# EAGLE board RefOsc10MHz_3V0 (EAGLE 7.2.0)
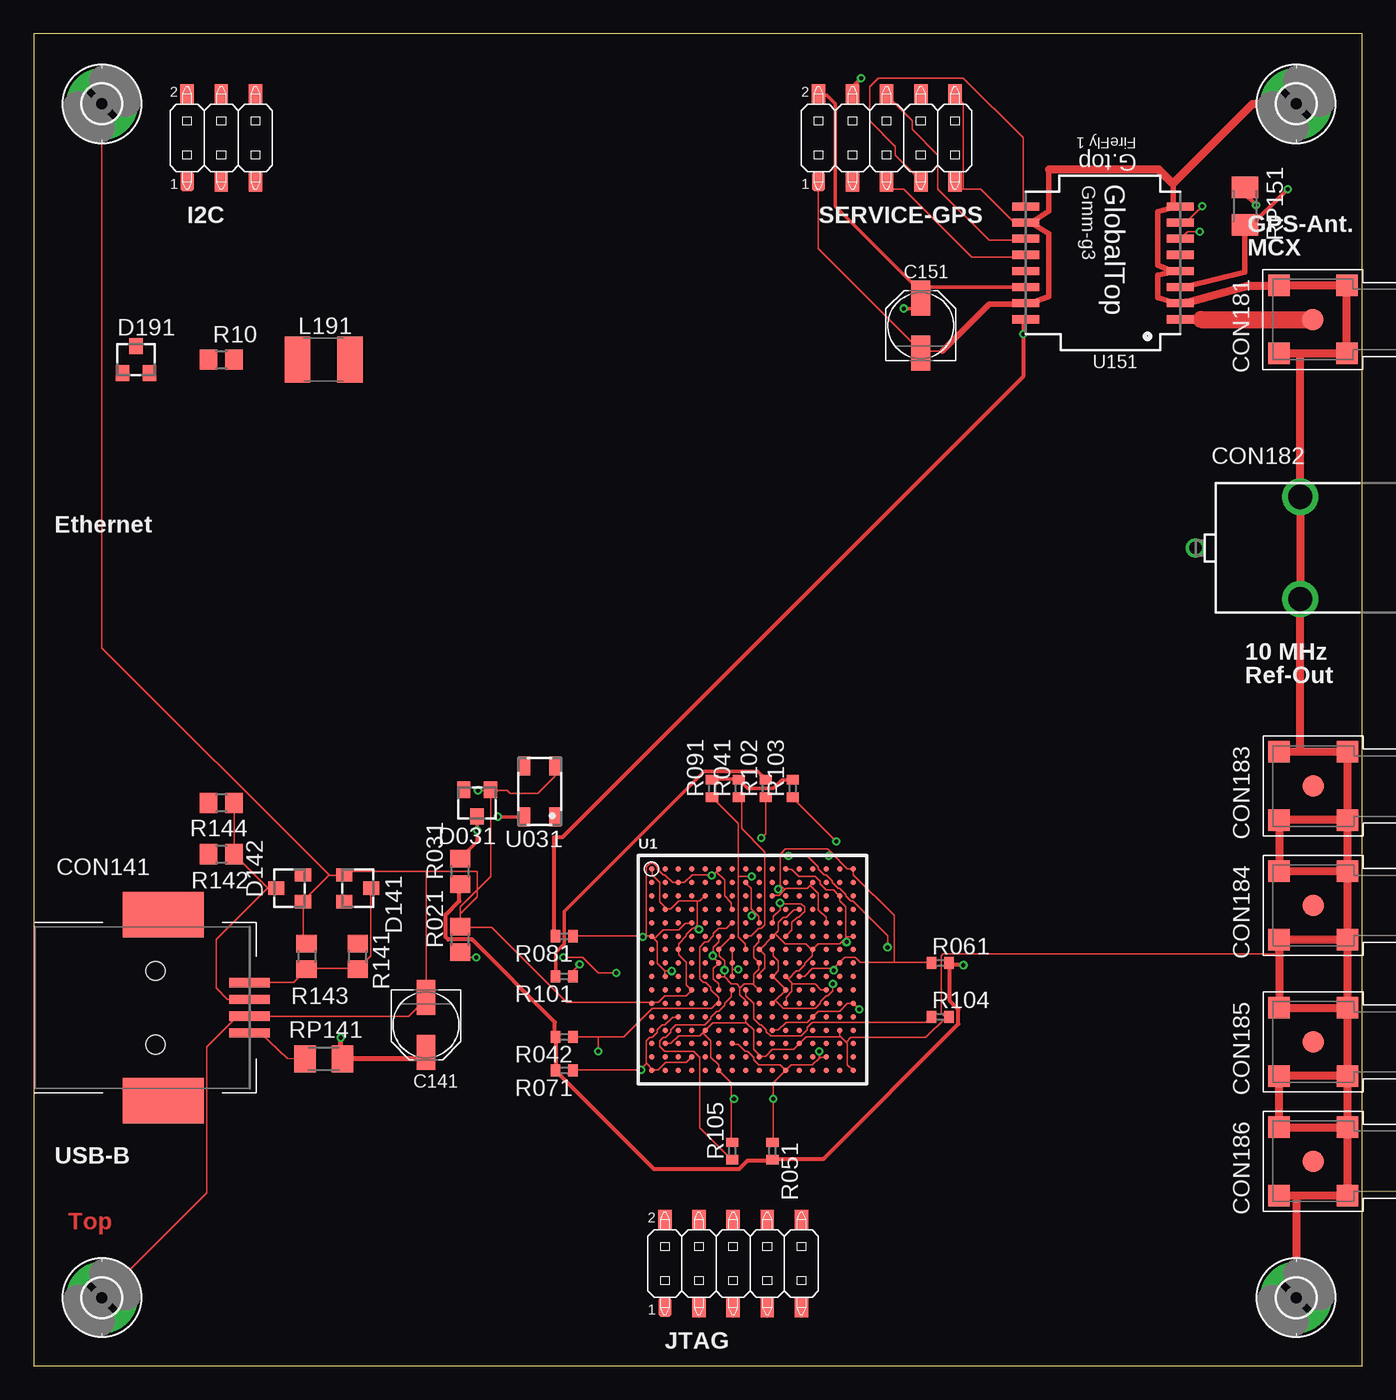
[diagram p0: board, top side]
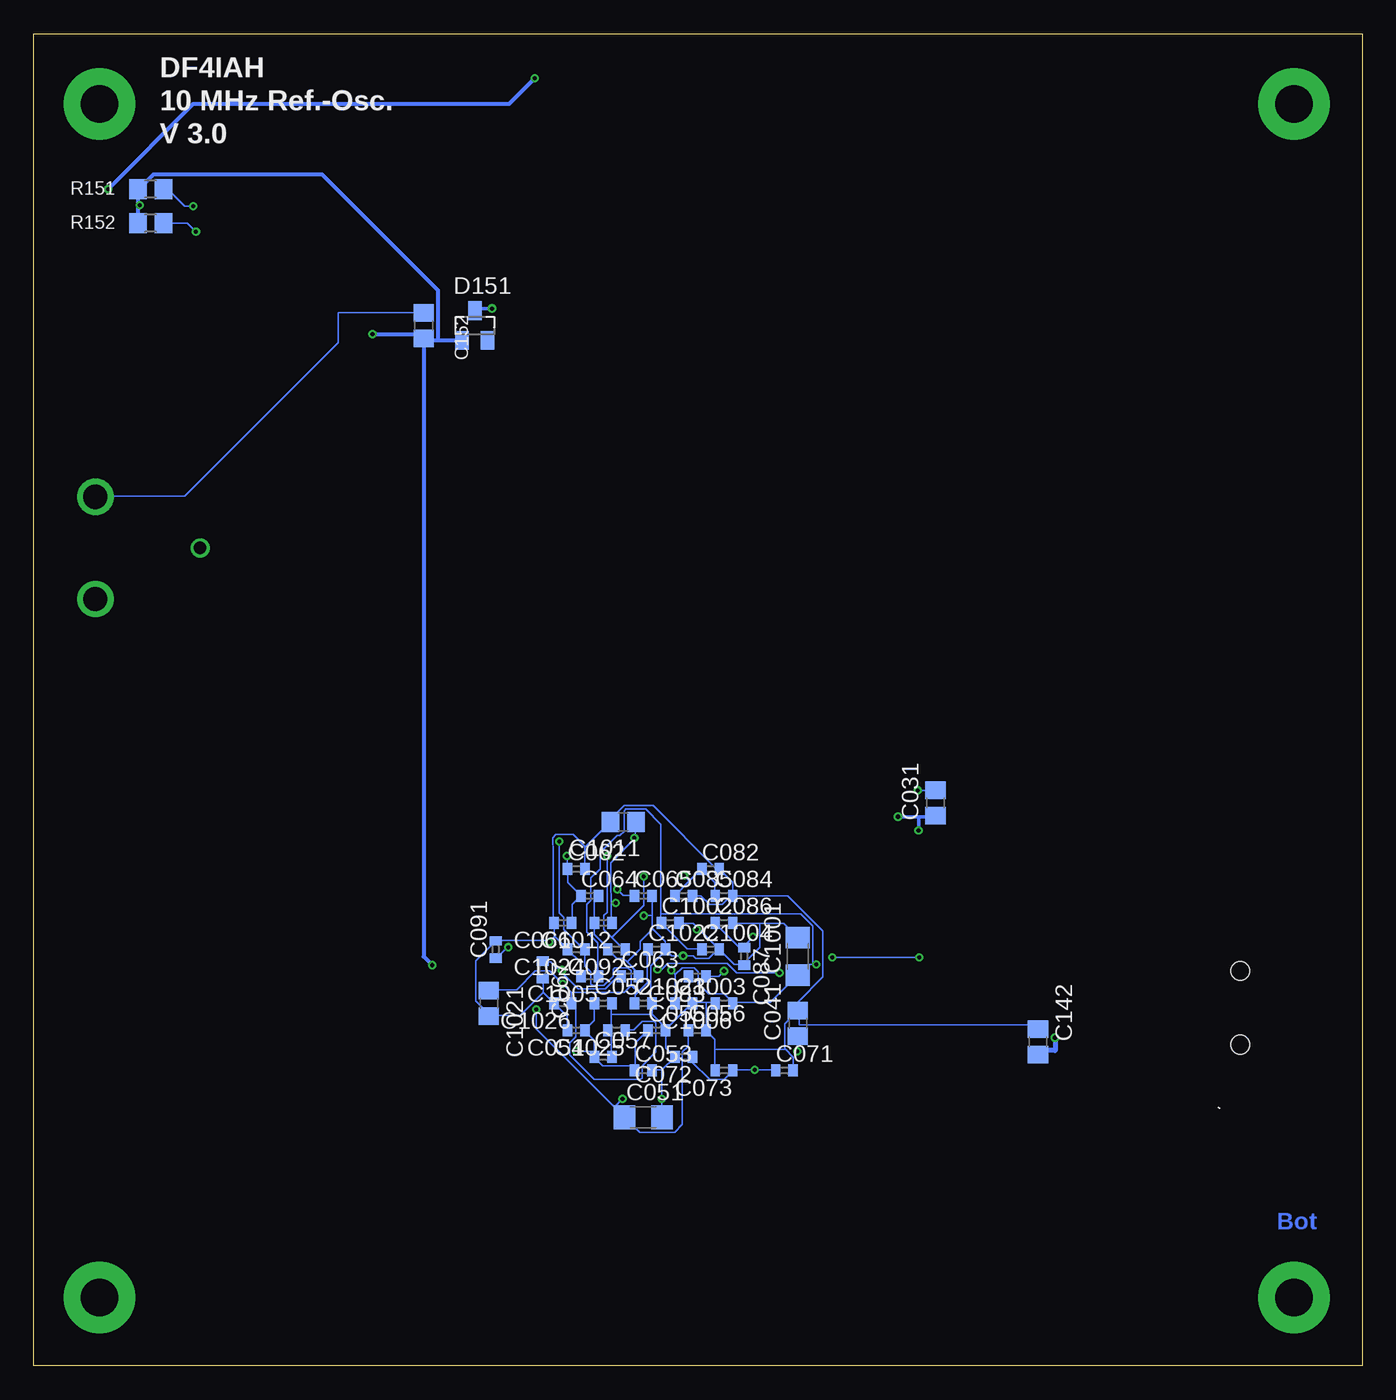
[diagram p1: board, bottom side, seen from below]

Size 98.89 x 99.21 mm. Coordinates in mm from the lower left corner, seen from the top.
Outline: 0,0 98.89,0 98.89,99.21 0,99.21 0,0
Copper layers (1*16): Top 0.035mm / dielectric 1.5mm / Bottom 0.035mm
Design rules "dirt_cheap_dirty_boards.v1": minimum track width 5mil, minimum drill 12mil, track to track 5mil, track to pad 5mil, pad to pad 5mil, via to via 5mil, smd to smd 0mil, copper to edge 10mil, drill to drill 10mil, minimum pad ring 10mil, minimum via ring 6mil, stop-mask expansion 2mil, vias tented up to drill 25mil, thermal gap 10mil
Net classes: 1 PWR_LOW: width 0.254 mm; 2 PWR_MED: width 0.305 mm; 3 PWR_HI: width 0.381 mm; 4 PAIR_50R: width 2.819 mm, clearance 5.08 mm; 5 PAIR_100R: width 1.143 mm, clearance 3.81 mm; 6 CLK: clearance 1.27 mm
tRestrict: area 76.7,76.2 to 82.3,87.5; area 94,76.2 to 96.5,80; area 82.5,76.2 to 91.4,77; area 96.5,94 to 99.1,95.2
bRestrict: area 76.7,76.2 to 82.3,87.5; area 94,76.2 to 96.5,80; area 82.5,76.2 to 91.4,77; area 96.5,94 to 99.1,95.2

## Footprints (pad centres in the part's own frame; a part is rotated, then mirrored left to right if it is on the bottom)
C0805 = smd 1.3 x 1.5: 1 -0.95,0; 2 0.95,0
C1206 = smd 1.6 x 1.8: 1 -1.4,0; 2 1.4,0
C0402 = smd 0.7 x 0.9: 1 -0.65,0; 2 0.65,0
PANASONIC_C = smd 2.6 x 1.4: + 2.05,0; - -2.05,0
TYCO-AMP_USB-B_SMT = smd 6.04 x 3.4: 0A 0,6.92; 0B 0,-6.92 | smd 3 x 0.7: 1 -6.42,1.87; 2 -6.42,-0.62; 3 -6.42,-1.87; 4 -6.42,0.62 | hole 1.4: 0.58,-2.75; 0.58,2.75
2X5SMD = smd 1 x 1.5: 1 -5.08,-3.25; 2 -5.08,3.25; 3 -2.54,-3.25; 4 -2.54,3.25; 5 0,-3.25; 6 0,3.25; 7 2.54,-3.25; 8 2.54,3.25; 9 5.08,-3.25; 10 5.08,3.25
MCX-J-P-X-RA-SM1 = smd 1.6 x 1.6: 1 0,0; 2 -2.54,2.54; 3 2.54,2.54; 4 -2.54,-2.54; 5 2.54,-2.54
MOLEX_BNC-JACK-50R_SD-73100-0105 = drill 0.92: 1 12.4,0 | drill 1.8: 2 4.6,3.8; 3 4.6,-3.8
2X03SMD = smd 1 x 1.5: 1 -2.54,-3.25; 2 -2.54,3.25; 3 0,-3.25; 4 0,3.25; 5 2.54,-3.25; 6 2.54,3.25
TO236 = smd 1 x 1.2: A -1,-1; C 0,1; NC 1,-1
SOT23 = smd 1 x 1.4: 1 -0.95,-1.1; 2 0.95,-1.1; 3 0,1.1
2,8-PAD = drill 2.8 pad 5.334: B2,8 0,0
L1812 = smd 1.9 x 3.4: 1 -1.95,0; 2 1.95,0
R0805 = smd 1.3 x 1.5: 1 -0.95,0; 2 0.95,0
R0402 = smd 0.7 x 0.9: 1 -0.65,0; 2 0.65,0
M1206 = smd 1.6 x 2: 1 -1.4,0; 2 1.4,0
FTG256_0MM4 = smd 0.4 x 0.4: A1 -7.5,7.5; A2 -6.5,7.5; A3 -5.5,7.5; A4 -4.5,7.5; A5 -3.5,7.5; A6 -2.5,7.5; A7 -1.5,7.5; A8 -0.5,7.5; A9 0.5,7.5; A10 1.5,7.5; A11 2.5,7.5; A12 3.5,7.5; A13 4.5,7.5; A14 5.5,7.5; A15 6.5,7.5; A16 7.5,7.5; B1 -7.5,6.5; B2 -6.5,6.5; B3 -5.5,6.5; B4 -4.5,6.5; B5 -3.5,6.5; B6 -2.5,6.5; B7 -1.5,6.5; B8 -0.5,6.5; B9 0.5,6.5; B10 1.5,6.5; B11 2.5,6.5; B12 3.5,6.5; B13 4.5,6.5; B14 5.5,6.5; B15 6.5,6.5; B16 7.5,6.5; C1 -7.5,5.5; C2 -6.5,5.5; C3 -5.5,5.5; C4 -4.5,5.5; C5 -3.5,5.5; C6 -2.5,5.5; C7 -1.5,5.5; C8 -0.5,5.5; C9 0.5,5.5; C10 1.5,5.5; C11 2.5,5.5; C12 3.5,5.5; C13 4.5,5.5; C14 5.5,5.5; C15 6.5,5.5; C16 7.5,5.5; D1 -7.5,4.5; D2 -6.5,4.5; D3 -5.5,4.5; D4 -4.5,4.5; D5 -3.5,4.5; D6 -2.5,4.5; D7 -1.5,4.5; D8 -0.5,4.5; D9 0.5,4.5; D10 1.5,4.5; D11 2.5,4.5; D12 3.5,4.5; D13 4.5,4.5; D14 5.5,4.5; D15 6.5,4.5; D16 7.5,4.5; E1 -7.5,3.5; E2 -6.5,3.5; E3 -5.5,3.5; E4 -4.5,3.5; E5 -3.5,3.5; E6 -2.5,3.5; E7 -1.5,3.5; E8 -0.5,3.5; E9 0.5,3.5; E10 1.5,3.5; E11 2.5,3.5; E12 3.5,3.5; E13 4.5,3.5; E14 5.5,3.5; E15 6.5,3.5; E16 7.5,3.5; F1 -7.5,2.5; F2 -6.5,2.5; F3 -5.5,2.5; F4 -4.5,2.5; F5 -3.5,2.5; F6 -2.5,2.5; F7 -1.5,2.5; F8 -0.5,2.5; F9 0.5,2.5; F10 1.5,2.5; F11 2.5,2.5; F12 3.5,2.5; F13 4.5,2.5; F14 5.5,2.5; F15 6.5,2.5; F16 7.5,2.5; G1 -7.5,1.5; G2 -6.5,1.5; G3 -5.5,1.5; G4 -4.5,1.5; G5 -3.5,1.5; G6 -2.5,1.5; G7 -1.5,1.5; G8 -0.5,1.5; G9 0.5,1.5; G10 1.5,1.5; G11 2.5,1.5; G12 3.5,1.5; G13 4.5,1.5; G14 5.5,1.5; G15 6.5,1.5; G16 7.5,1.5; H1 -7.5,0.5; H2 -6.5,0.5; H3 -5.5,0.5; H4 -4.5,0.5; H5 -3.5,0.5; H6 -2.5,0.5; H7 -1.5,0.5; H8 -0.5,0.5; H9 0.5,0.5; H10 1.5,0.5; H11 2.5,0.5; H12 3.5,0.5; H13 4.5,0.5; H14 5.5,0.5; H15 6.5,0.5; H16 7.5,0.5; J1 -7.5,-0.5; J2 -6.5,-0.5; J3 -5.5,-0.5; J4 -4.5,-0.5; J5 -3.5,-0.5; J6 -2.5,-0.5; J7 -1.5,-0.5; J8 -0.5,-0.5; J9 0.5,-0.5; J10 1.5,-0.5; J11 2.5,-0.5; J12 3.5,-0.5; J13 4.5,-0.5; J14 5.5,-0.5; J15 6.5,-0.5; J16 7.5,-0.5; K1 -7.5,-1.5; K2 -6.5,-1.5; K3 -5.5,-1.5; K4 -4.5,-1.5; K5 -3.5,-1.5; K6 -2.5,-1.5; K7 -1.5,-1.5; K8 -0.5,-1.5; K9 0.5,-1.5; K10 1.5,-1.5; K11 2.5,-1.5; K12 3.5,-1.5; K13 4.5,-1.5; K14 5.5,-1.5; K15 6.5,-1.5; K16 7.5,-1.5; L1 -7.5,-2.5; L2 -6.5,-2.5; L3 -5.5,-2.5; L4 -4.5,-2.5; L5 -3.5,-2.5; L6 -2.5,-2.5; L7 -1.5,-2.5; L8 -0.5,-2.5; L9 0.5,-2.5; L10 1.5,-2.5; L11 2.5,-2.5; L12 3.5,-2.5; L13 4.5,-2.5; L14 5.5,-2.5; L15 6.5,-2.5; L16 7.5,-2.5; M1 -7.5,-3.5; M2 -6.5,-3.5; M3 -5.5,-3.5; M4 -4.5,-3.5; M5 -3.5,-3.5; M6 -2.5,-3.5; M7 -1.5,-3.5; M8 -0.5,-3.5; M9 0.5,-3.5; M10 1.5,-3.5; M11 2.5,-3.5; M12 3.5,-3.5; M13 4.5,-3.5; M14 5.5,-3.5; M15 6.5,-3.5; M16 7.5,-3.5; N1 -7.5,-4.5; N2 -6.5,-4.5; N3 -5.5,-4.5; N4 -4.5,-4.5; N5 -3.5,-4.5; N6 -2.5,-4.5; N7 -1.5,-4.5; N8 -0.5,-4.5; N9 0.5,-4.5; N10 1.5,-4.5; N11 2.5,-4.5; N12 3.5,-4.5; N13 4.5,-4.5; N14 5.5,-4.5; N15 6.5,-4.5; N16 7.5,-4.5; P1 -7.5,-5.5; P2 -6.5,-5.5; P3 -5.5,-5.5; P4 -4.5,-5.5; P5 -3.5,-5.5; P6 -2.5,-5.5; P7 -1.5,-5.5; P8 -0.5,-5.5; P9 0.5,-5.5; P10 1.5,-5.5; P11 2.5,-5.5; P12 3.5,-5.5; P13 4.5,-5.5; P14 5.5,-5.5; P15 6.5,-5.5; P16 7.5,-5.5; R1 -7.5,-6.5; R2 -6.5,-6.5; R3 -5.5,-6.5; R4 -4.5,-6.5; R5 -3.5,-6.5; R6 -2.5,-6.5; R7 -1.5,-6.5; R8 -0.5,-6.5; R9 0.5,-6.5; R10 1.5,-6.5; R11 2.5,-6.5; R12 3.5,-6.5; R13 4.5,-6.5; R14 5.5,-6.5; R15 6.5,-6.5; R16 7.5,-6.5; T1 -7.5,-7.5; T2 -6.5,-7.5; T3 -5.5,-7.5; T4 -4.5,-7.5; T5 -3.5,-7.5; T6 -2.5,-7.5; T7 -1.5,-7.5; T8 -0.5,-7.5; T9 0.5,-7.5; T10 1.5,-7.5; T11 2.5,-7.5; T12 3.5,-7.5; T13 4.5,-7.5; T14 5.5,-7.5; T15 6.5,-7.5; T16 7.5,-7.5
CFPT-141 = smd 1.4 x 0.9: 1 -1.9,-1.15; 2 1.9,-1.15; 3 1.9,1.15; 4 -1.9,1.15
GLOBALTOP-FIREFLY1-GMM-G3 = smd 2 x 0.6: 1 -5.715,4.35; 2 -5.715,3.15; 3 -5.715,1.95; 4 -5.715,0.75; 5 -5.715,-0.45; 6 -5.715,-1.65; 7 -5.715,-2.85; 8 -5.715,-4.05; 9 5.785,-4.05; 10 5.785,-2.85; 11 5.785,-1.65; 12 5.785,-0.45; 13 5.785,0.75; 14 5.785,1.95; 15 5.785,3.15; 16 5.785,4.35

## Placement (x,y rotation side)
C031  100n  [C0805]  31.75,41.91 90 bottom
C041  47uF  [C0805]  42,25.5 90 bottom
C051  100uF  [C1206]  53.5,18.5 0 bottom
C052  4.7uF  [C0402]  56.5,27 0 bottom
C053  4.7uF  [C0402]  53.5,22 0 bottom
C054  0.47uF  [C0402]  58.5,25 180 bottom
C055  0.47uF  [C0402]  52.5,25 0 bottom
C056  0.47uF  [C0402]  49.5,25 0 bottom
C057  0.47uF  [C0402]  56.5,23 0 bottom
C062  4.7uF  [C0402]  58.5,37 0 bottom
C063  4.7uF  [C0402]  54.5,29 0 bottom
C064  0.47uF  [C0402]  57.5,35 0 bottom
C065  0.47uF  [C0402]  53.5,35 0 bottom
C066  0.47uF  [C0402]  59.5,33 180 bottom
C067  0.47uF  [C0402]  61,29.5 270 bottom
C071  4.7uF  [C0402]  43,22 0 bottom
C072  0.47uF  [C0402]  50.5,23 180 bottom
C073  0.47uF  [C0402]  47.5,22 180 bottom
C082  4.7uF  [C0402]  48.5,37 0 bottom
C083  4.7uF  [C0402]  49.5,29 180 bottom
C084  0.47uF  [C0402]  47.5,35 0 bottom
C085  0.47uF  [C0402]  50.5,35 0 bottom
C086  0.47uF  [C0402]  47.5,33 0 bottom
C087  0.47uF  [C0402]  46,30.5 270 bottom
C091  4.7uF  [C0402]  64.5,31 90 bottom
C092  0.47uF  [C0402]  55.5,31 180 bottom
C141  47uF  [PANASONIC_C]  29.21,25.4 270 top
C142  100n  [C0805]  24.13,24.13 90 bottom
C151  0.22F  [PANASONIC_C]  66.04,77.47 90 top
C152  100n  [C0805]  69.85,77.47 90 bottom
C1001  100uF  [C1206]  42,30.5 90 bottom
C1002  4.7uF  [C0402]  51.5,33 0 bottom
C1003  4.7uF  [C0402]  50.5,27 0 bottom
C1004  0.47uF  [C0402]  48.5,31 0 bottom
C1005  0.47uF  [C0402]  57.5,29 180 bottom
C1006  0.47uF  [C0402]  47.5,27 180 bottom
C1011  47uF  [C0805]  55,40.5 180 bottom
C1012  0.47uF  [C0402]  56.5,33 180 bottom
C1021  47uF  [C0805]  65,27 270 bottom
C1022  4.7uF  [C0402]  52.5,31 0 bottom
C1023  4.7uF  [C0402]  53.5,27 0 bottom
C1024  0.47uF  [C0402]  58.5,31 180 bottom
C1025  0.47uF  [C0402]  55.5,25 180 bottom
C1026  0.47uF  [C0402]  59.5,27 180 bottom
CON141  TYCO-AMP_USBUSB-B_SMT  [TYCO-AMP_USB-B_SMT]  9.65,26.67 180 top
CON151  HEADER-2X5SMD  [2X5SMD]  63.5,91.44 0 top
CON181  MCX-J-P-X-RA-SM1  [MCX-J-P-X-RA-SM1]  95.23,77.92 270 top
CON182  SD-73100-0105  [MOLEX_BNC-JACK-50R_SD-73100-0105]  98.89,60.91 180 top
CON183  MCX-J-P-X-RA-SM1  [MCX-J-P-X-RA-SM1]  95.25,43.18 270 top
CON184  MCX-J-P-X-RA-SM1  [MCX-J-P-X-RA-SM1]  95.25,34.29 270 top
CON185  MCX-J-P-X-RA-SM1  [MCX-J-P-X-RA-SM1]  95.25,24.13 270 top
CON186  MCX-J-P-X-RA-SM1  [MCX-J-P-X-RA-SM1]  95.25,15.24 270 top
CON191  HEADER-2X3SMD  [2X03SMD]  13.97,91.44 0 top
CON192  AVR-JTAG-10SMD  [2X5SMD]  52.07,7.62 0 top
D031  BZX84-C3V0  [TO236]  33.02,41.91 180 top
D141  BZX84-C3V6  [TO236]  24.13,35.56 270 top
D142  BZX84-C3V6  [TO236]  19.05,35.56 90 top
D151  CRS08  [SOT23]  66.04,77.47 0 bottom
D191  BZX84-C2V7  [TO236]  7.62,74.93 0 top
H191  MOUNT-PAD-ROUND2.8  [2,8-PAD]  5.08,5.08 0 top
H192  MOUNT-PAD-ROUND2.8  [2,8-PAD]  93.98,5.08 0 top
H193  MOUNT-PAD-ROUND2.8  [2,8-PAD]  93.98,93.98 0 top
H194  MOUNT-PAD-ROUND2.8  [2,8-PAD]  5.08,93.98 0 top
L191  10uH  [L1812]  21.59,74.93 0 top
R10  51  [R0805]  13.97,74.93 0 top
R021  0  [R0805]  31.75,31.75 90 top
R031  56  [R0805]  31.75,36.83 90 top
R041  0  [R0402]  52.5,43 90 top
R042  0  [R0402]  39.5,24.5 180 top
R051  0  [R0402]  55,16 270 top
R061  0  [R0402]  67.5,30 0 top
R071  0  [R0402]  39.5,22 180 top
R081  0  [R0402]  39.5,32 180 top
R091  0  [R0402]  50.5,43 90 top
R101  0  [R0402]  39.5,29 180 top
R102  0  [R0402]  54.5,43 90 top
R103  0  [R0402]  56.5,43 90 top
R104  0  [R0402]  67.5,26 0 top
R105  0  [R0402]  52,16 90 top
R141  68  [R0805]  24.13,30.48 90 top
R142  68  [R0805]  13.97,38.1 180 top
R143  1M  [R0805]  20.32,30.48 270 top
R144  1.5k  [R0805]  13.97,41.91 180 top
R151  10k  [R0805]  90.17,87.63 180 bottom
R152  10k  [R0805]  90.17,85.09 180 bottom
RP141  1206L025YR_0.5A  [M1206]  21.59,22.86 0 top
RP151  1206L012WR_0.1A  [M1206]  90.17,86.36 90 top
U1  XC7A35TFTG256  [FTG256_0MM4]  53.5,29.5 0 top
U031  CFPT-141  [CFPT-141]  37.67,42.78 90 top
U151  GLOBALTOP-FIREFLY1-GMM-G3  [GLOBALTOP-FIREFLY1-GMM-G3]  79.63,82.28 180 top

## Library data of the parts
C031 C041 C051-C057 C062-C067 C071-C073 C082-C087 C091 C092 C141 C142 C151 C1001-C1006 C1011 C1012 C1021-C1026 L191 R10 R021 R031 R041 R042 R051 R061 R071 R081 R091 R101-R105 R141-R144 R151 R152 RP141 RP151 = rcl
C152 CON181 CON183-CON186 CON191 CON192 = df4iah
CON141 = df4iah; MF: TYCO-AMP; MPN: 1734346; OC_FARNELL: 1321918
CON151 = df4iah_connector
CON182 = df4iah; MF: MOLEX; MPN: SD-73100-0105; OC_FARNELL: 1909203; OC_NEWARK: -
D031 D141 D142 D151 D191 = diode
H191-H194 = holes
U1 = df4iah_fpga
U031 = df4iah; MF: IQD-FREQUENCY-PRODUCTS; MPN: LFTVXO022175; OC_FARNELL: 1100745; OC_NEWARK: -
U151 = df4iah_gps

## Nets
AGND: R021.1 U1.G7 U1.H7 U1.J7
FPGA_ADC_VP_0: U1.H8
FPGA_DXN_0: R105.1 U1.K7
FPGA_DXP_0: R104.1 U1.K8
FPGA_VCCADC_0: C091.1 C092.1 R091.1 U1.G8
FPGA_VCCAUX: C1021.1 C1022.1 C1023.1 C1024.1 C1025.1 C1026.1 R103.1 U1.G10 U1.J10 U1.K11 U1.L10
FPGA_VCCBATT: R041.1 U1.F8
FPGA_VCCBRAM: C1011.1 C1012.1 R102.1 U1.E10 U1.F11
FPGA_VCCINT: C1001.1 C1002.1 C1003.1 C1004.1 C1005.1 C1006.1 R101.1 U1.F7 U1.F9 U1.G6 U1.H9 U1.J6 U1.K9 U1.L8
FPGA_VCCO_0: C041.1 R042.1 U1.E7 U1.L6
FPGA_VCCO_14: C051.1 C052.1 C053.1 C054.1 C055.1 C056.1 C057.1 R051.1 U1.L16 U1.M13 U1.N10 U1.P7 U1.R14 U1.T11
FPGA_VCCO_15: C062.1 C063.1 C064.1 C065.1 C066.1 C067.1 R061.1 U1.A16 U1.B13 U1.C10 U1.E14 U1.H15 U1.J12
FPGA_VCCO_34: C071.1 C072.1 C073.1 R071.1 U1.M3 U1.R4 U1.T1
FPGA_VCCO_35: C082.1 C083.1 C084.1 C085.1 C086.1 C087.1 R081.1 U1.A6 U1.B3 U1.D7 U1.E4 U1.F1 U1.J2
GND: C031.2 C041.2 C051.2 C052.2 C053.2 C054.2 C055.2 C056.2 C057.2 C062.2 C063.2 C064.2 C065.2 C066.2 C067.2 C071.2 C072.2 C073.2 C082.2 C083.2 C084.2 C085.2 C086.2 C087.2 C091.2 C092.2 C141.- C142.2 C151.- C152.2 C1001.2 C1002.2 C1003.2 C1004.2 C1005.2 C1006.2 C1011.2 C1012.2 C1021.2 C1022.2 C1023.2 C1024.2 C1025.2 C1026.2 CON141.4 CON151.1 CON151.9 CON151.10 CON181.2 CON181.3 CON181.4 CON181.5 CON182.2 CON182.3 CON183.2 CON183.3 CON183.4 CON183.5 CON184.2 CON184.3 CON184.4 CON184.5 CON185.2 CON185.3 CON185.4 CON185.5 CON186.2 CON186.3 CON186.4 CON186.5 D031.A D141.A D142.A H191.B2,8 H192.B2,8 H193.B2,8 H194.B2,8 R021.2 R104.2 R105.2 R143.1 U1.A1 U1.A11 U1.B8 U1.C5 U1.C15 U1.D2 U1.D12 U1.E9 U1.F6 U1.F10 U1.F16 U1.G3 U1.G9 U1.G13 U1.H6 U1.J9 U1.J11 U1.K4 U1.K6 U1.K14 U1.L1 U1.L11 U1.M8 U1.N5 U1.N15 U1.P2 U1.P12 U1.R9 U1.T6 U1.T16 U031.2 U151.2 U151.4 U151.8 U151.10 U151.15
GPS_2ND_RX: R152.1 U151.6
GPS_2ND_TX: U151.5
GPS_3DFIX: U151.13
GPS_ANT: CON181.1 U151.1
GPS_ANT_PWR [PWR_MED]: CON151.4 RP151.1 U151.3
GPS_NMEA_RX: CON151.5 U151.12
GPS_NMEA_TX: CON151.6 U151.11
GPS_NRESET: R151.1 U151.7
GPS_PPS: CON151.7 U151.9
PWR_1V0 [PWR_LOW]: R101.2 R102.2
PWR_1V8 [PWR_LOW]: R041.2 R091.2 R103.2
PWR_1V25_PREC: U1.J8
PWR_3V3 [PWR_MED]: C152.1 D151.1 R031.1 R042.2 R051.2 R061.2 R071.2 R081.2 R151.2 R152.2 RP151.2 U151.16
PWR_5V0: CON151.3
PWR_BACKUP_GPS [PWR_LOW]: C151.+ CON151.2 D151.3 U151.14
PWR_VCTCXO_3V0 [PWR_LOW]: C031.1 D031.C R031.2 U031.4
REFC_10MHZ: CON182.1
REFC_20MHZ [CLK]: U031.3
SIG_CH0_I: CON183.1
SIG_CH0_Q: CON184.1
SIG_CH1_I: CON185.1
SIG_CH1_Q: CON186.1
USB_5V [PWR_HI]: C141.+ C142.1 RP141.2
USB_D_MIN1: CON141.2 D142.C R142.1 R144.1
USB_D_MNS: R142.2
USB_D_PLS: R141.2
USB_D_PLS1: CON141.3 D141.C R141.1 R143.2
USB_DISC: R144.2
USB_PWR1: CON141.1 RP141.1
VCTCXO_VC: U031.1

## Tracks (layer width: path | path; a pad name or v marks a point on that pad's centre or on a via)
AGND  (via drill 0.3)
  Top 0.127: U1.G7 52.01,30.99 52.01,30.04 U1.H7 52.01,29.97 52.01,29.53 | 52.01,29.53 52.01,29.02 U1.J7 | v52.45,29.53 52.01,29.53 | v43.37,29.27 42.04,29.27 40.89,30.42 v39.43,30.42 | v32.96,30.42 32.13,30.42 R021.1
  Bottom 0.127: v52.45,29.53 52.13,29.53 51.69,29.97 47.24,29.97 46.55,29.27 v43.37,29.27 | v32.96,30.42 v39.43,30.42
FPGA_DXN_0
  Top 0.127: U1.K7 51.94,27.94 51.94,27.5 51.44,26.99 51.44,26.86 50.99,26.42 50.86,26.42 50.42,25.97 50.42,25.84 49.97,25.4 47.82,25.4 47.43,25.02 47.43,24.83 47.05,24.45 46.86,24.45 46.61,24.19 46.61,23.81 46.99,23.43 49.15,23.43 49.59,22.99 49.59,17.72 51.94,15.37 R105.1
FPGA_DXP_0
  Top 0.127: U1.K8 53.02,27.94 53.02,27.56 53.59,26.99 53.59,25.84 54.04,25.4 54.17,25.4 54.55,25.02 54.55,24.89 54.86,24.57 57.15,24.57 57.59,25.02 57.59,25.21 57.98,25.59 66.42,25.59 66.8,25.97 R104.1
FPGA_VCCADC_0  (via drill 0.3)
  Top 0.127: 52.45,36.45 52.45,40.39 50.55,42.29 R091.1 | 52.45,36.45 52.45,31.94 52.96,31.43 52.96,31.05 U1.G8 | v63.56,31.18 63.56,32 60.96,34.61 60.83,34.61 60.45,34.99 60.45,35.12 60.01,35.56 59.88,35.56 59.44,36.01 59.44,36.13 58.99,36.58 58.86,36.58 58.42,37.02 58.42,37.15 57.59,37.97 v56.2,37.97 | v53.47,36.45 52.45,36.45
  Bottom 0.127: v63.56,31.18 63.63,31.18 64.45,30.35 C091.1 | v56.2,37.97 56.2,33.78 56.45,33.53 56.45,32.51 55.85,31.91 | 55.85,31.91 54.99,31.05 54.86,31.05 C092.1 | v53.47,36.45 53.47,34.29 55.85,31.91
FPGA_VCCAUX  (via drill 0.3)
  Top 0.127: 55.21,27.21 55.94,27.94 U1.K11 55.05,28.96 U1.J10 55.05,29.02 55.44,29.4 55.44,30.16 55.05,30.54 55.05,30.99 U1.G10 | 55.21,27.21 55.05,27.05 U1.L10 | 55.21,27.21 55.82,26.61 58.17,26.61 58.55,26.99 58.55,27.11 58.99,27.56 59.12,27.56 59.5,27.94 v59.5,28.45 | v59.75,39.05 56.52,42.29 R103.1
  Bottom 0.127: C1025.1 54.8,25.02 54.23,25.02 53.59,25.65 52.7,25.65 52.58,25.53 52.58,23.37 53.59,22.35 53.59,21.46 53.72,21.34 57.15,21.34 58.99,23.18 58.99,24.07 58.55,24.51 58.55,26.73 58.8,26.99 C1026.1 58.86,27.05 58.86,27.81 | 58.86,27.81 v59.5,28.45 60.45,29.4 61.53,29.4 62.93,28 64.96,28 C1021.1 | 53.88,27.84 53.21,28.51 53.21,30.99 C1022.1 | 53.88,27.84 54.1,27.62 54.1,27.05 C1023.1 | 53.88,27.84 54.39,28.35 | 54.39,28.35 54.42,28.38 54.42,29.4 54.67,29.65 55.63,29.65 55.75,29.53 55.75,29.02 56.45,28.32 57.28,28.32 57.4,28.45 57.4,29.34 57.85,29.78 57.85,30.99 C1024.1 57.91,30.99 59.44,32.51 59.44,33.4 59.75,33.72 v59.75,39.05 | 58.86,27.81 54.93,27.81 54.39,28.35
FPGA_VCCBATT
  Top 0.127: U1.F8 53.02,32 53.4,32 53.98,32.58 54.17,32.58 54.42,32.83 54.42,38.29 52.7,40.01 52.7,42.1 52.51,42.29 R041.1
FPGA_VCCBRAM  (via drill 0.3)
  Top 0.127: 55.72,34.32 55.82,34.42 57.15,34.42 57.4,34.16 57.4,33.85 56.96,33.4 56.83,33.4 56.45,33.02 56.45,32.45 U1.F11 | 55.72,34.32 55.56,34.16 55.56,33.97 55.05,33.47 55.05,33.02 U1.E10 | v54.17,39.31 54.48,39.62 54.48,42.29 R102.1 | v55.56,34.48 55.72,34.32
  Bottom 0.127: 55.88,34.48 55.88,35.18 55.94,35.24 55.94,37.47 54.13,39.27 | 55.88,34.48 55.88,33.02 C1012.1 | 54.13,39.27 54.1,39.31 54.1,40.45 C1011.1 | v54.17,39.31 54.13,39.27 | 55.88,34.48 v55.56,34.48
FPGA_VCCINT  (via drill 0.3)
  Top 0.127: U1.F7 51.94,31.94 51.05,31.05 U1.G6 51.05,30.99 51.05,30.54 51.44,30.16 v51.44,29.46 51.44,28.96 | 52.61,28.16 52.9,28.45 53.53,28.45 53.56,28.42 | 52.61,28.16 52.58,28.13 52.58,27.62 52.96,27.24 52.96,27.05 U1.L8 | 53.56,28.42 53.98,28 U1.K9 | 51.44,28.96 51.05,28.96 U1.J6 | 51.44,28.96 51.94,28.45 52.32,28.45 52.61,28.16 | 53.56,28.42 53.59,28.45 53.59,29.15 53.98,29.53 53.98,29.97 U1.H9 53.98,30.04 53.59,30.42 53.59,31.18 53.98,31.56 53.98,31.94 U1.F9 | v40.64,29.91 40.2,29.46 40.2,29.02 R101.1
  Bottom 0.127: 40.89,29.91 41.21,29.91 41.97,29.15 C1001.1 42.04,29.08 44.07,27.05 46.8,27.05 C1006.1 46.86,27.05 47.5,27.69 48.64,27.69 49.4,28.45 49.4,29.34 49.72,29.65 50.61,29.65 51.12,29.15 | 51.12,29.15 51.12,27.05 C1003.1 | 51.12,29.15 v51.44,29.46 | C1004.1 49.21,31.05 50.23,31.05 52.13,32.96 C1002.1 52.2,33.02 52.2,33.66 | 52.2,33.66 52.2,40.32 53.34,41.47 54.8,41.47 54.93,41.34 54.93,39.81 55.24,39.5 55.44,39.5 56.71,38.23 56.71,37.02 57.4,36.32 57.4,34.67 57.72,34.35 57.72,32.32 56.9,31.5 56.9,29.02 C1005.1 | 40.89,29.91 40.89,32.77 41.78,33.66 52.2,33.66 | 40.89,29.91 v40.64,29.91
FPGA_VCCO_0  (via drill 0.3)
  Top 0.127: U1.E7 51.94,32.96 51.56,32.58 50.99,32.58 50.61,32.19 50.61,32 50.16,31.56 49.97,31.56 49.59,31.18 49.59,28.83 49.85,28.57 50.04,28.57 50.42,28.19 50.42,28 50.99,27.43 50.99,27.05 U1.L6 50.93,27.05 50.48,26.61 46.04,26.61 43.94,24.51 42.04,24.51 | 42.04,24.51 40.2,24.51 R042.1 | 42.04,24.51 v42.04,23.43
  Bottom 0.127: v42.04,23.43 42.04,24.51 C041.1
FPGA_VCCO_14  (via drill 0.3)
  Top 0.127: U1.P7 52.01,23.94 52.45,23.94 52.96,23.43 53.15,23.43 53.59,22.99 53.59,22.8 53.98,22.42 55.56,22.42 55.94,22.04 U1.T11 | 58.52,22.95 57.98,22.42 56.39,22.42 56.01,22.04 U1.T11 | 58.52,22.95 58.55,22.99 58.99,22.99 U1.R14 | R051.1 55.05,16.7 v55.05,19.88 55.05,21.08 55.94,21.97 U1.T11 | v58.48,23.43 58.48,22.99 58.52,22.95 | U1.N10 55.05,25.02 55.44,25.02 56.01,25.59 57.59,25.59 57.98,25.97 U1.M13 58.04,26.04 58.42,26.42 60.01,26.42 60.58,26.99 60.96,26.99 U1.L16 61.02,26.99 v61.47,26.54
  Bottom 0.127: 54.1,22.35 54.1,24.07 53.21,24.96 C055.1 | 54.1,22.35 54.1,22.04 C053.1 54.1,22.35 | 57.15,23.43 57.15,24.26 57.85,24.96 C054.1 57.85,25.02 57.15,25.72 C052.1 | 57.15,23.43 C057.1 | 54.1,22.35 56.52,22.35 57.15,22.99 C057.1 | v58.48,23.43 57.15,23.43 | 57.15,23.05 C057.1 | C056.1 50.16,24.96 50.16,23.81 50.61,23.37 50.61,17.97 51.18,17.4 53.78,17.4 54.86,18.48 C051.1 | v61.47,26.54 61.47,25.08 54.93,18.54 C051.1 | v55.05,19.88 55.63,19.3 C051.1
FPGA_VCCO_15  (via drill 0.3)
  Top 0.127: 55.91,35.47 56.01,35.56 57.59,35.56 57.82,35.78 | 55.91,35.47 55.5,35.05 55.05,35.05 U1.C10 | 57.82,35.78 57.98,35.94 U1.B13 | 57.82,35.78 58.42,35.18 58.42,33.97 58.99,33.4 58.99,33.02 U1.E14 | 59.4,38.2 59.12,38.48 55.94,38.48 55.56,38.1 55.56,35.81 55.66,35.72 | 59.4,38.2 60.58,37.02 60.96,37.02 U1.A16 61.02,36.96 61.02,36.58 64.07,33.53 64.07,30.04 | 55.91,35.47 55.66,35.72 | 55.66,35.72 v55.44,35.5 | 59.4,38.2 v59.18,37.97 | 59.56,29.59 57.98,29.59 57.4,29.02 57.02,29.02 U1.J12 | 59.56,29.59 59.94,29.97 U1.H15 60.01,30.04 60.39,30.42 61.15,30.42 61.53,30.04 64.07,30.04 | 64.07,30.04 66.8,30.04 R061.1 | 59.56,29.59 v59.56,29.46
  Bottom 0.127: C066.1 58.8,33.02 58.8,34.35 58.17,34.99 C064.1 58.17,35.05 59.12,36.01 59.12,36.96 C062.1 59.18,37.02 v59.18,37.97 | v55.44,35.5 54.99,35.05 54.17,35.05 C065.1 | 59.66,29.37 60.39,30.1 60.96,30.1 C067.1 | 59.66,29.37 58.36,28.07 56.33,28.07 55.44,28.96 55.18,28.96 C063.1 | v59.56,29.46 59.66,29.37
FPGA_VCCO_34  (via drill 0.3)
  Top 0.127: U1.R4 48.96,22.99 48.58,22.61 47.05,22.61 46.48,22.04 46.04,22.04 U1.T1 46.04,22.1 45.62,22.51 | 45.62,22.51 45.59,22.54 45.59,24.19 45.85,24.45 46.04,24.45 46.42,24.83 46.42,25.02 46.8,25.4 46.99,25.4 47.56,25.97 47.94,25.97 U1.M3 | 45.62,22.51 45.18,22.07 | 45.18,22.07 45.15,22.04 40.2,22.04 R071.1 | v45.21,22.04 45.18,22.07
  Bottom 0.127: C071.1 43.69,22.04 v45.21,22.04 46.8,22.04 C073.1 46.86,21.97 47.5,21.34 48.58,21.34 49.85,22.61 49.85,22.99 C072.1
FPGA_VCCO_35  (via drill 0.3)
  Top 0.127: 50.48,36.58 50.61,36.58 50.83,36.8 | 50.48,36.58 49.02,36.58 48.45,36.01 U1.B3 47.94,36.01 47.56,36.01 46.99,36.58 46.86,36.58 46.42,37.02 46.42,37.15 46.16,37.4 45.85,37.4 45.59,37.15 45.59,32 | 50.83,36.8 50.99,36.96 U1.A6 | 50.83,36.8 51.44,36.2 51.44,34.99 51.94,34.48 51.94,34.04 U1.D7 | 50.48,36.58 v50.48,36.51 | 46.99,29.4 46.99,29.02 U1.J2 | 46.99,29.4 46.42,29.97 46.42,31.56 46.2,31.78 | 46.2,31.78 46.04,31.94 U1.F1 45.97,32 45.59,32 | 46.2,31.78 46.86,32.45 48.01,32.45 48.51,32.96 48.96,32.96 U1.E4 | 45.59,32 45.34,32 | 45.34,32 40.2,32 R081.1 | 46.99,29.4 v47.5,29.4 | 45.34,32 v45.34,31.94 45.59,32
  Bottom 0.127: C084.1 48.2,35.05 48.2,36.01 49.15,36.96 C082.1 49.21,36.96 50.07,36.1 | 50.07,36.1 51.12,35.05 C085.1 | v50.48,36.51 50.07,36.1 | C086.1 48.13,32.96 46.35,31.18 46.04,31.18 C087.1 46.04,31.24 v45.34,31.94 | v47.5,29.4 47.88,29.02 48.83,29.02 C083.1
GND  (via drill 0.3)
  Top 0.127: R143.1 20.07,31.69 20.07,34.54 D142.A 20.07,34.61 21.97,36.51 22.04,36.51 | 22.04,36.51 23.11,36.51 D141.A 23.5,36.83 29.21,36.83 | H194.B2,8 5.08,53.47 22.04,36.51 | 94.3,57.15 CON182.2 94.3,57.09 | CON182.3 | 94.3,64.77 CON182.3 | CON184.5 92.71,30.92 | 94.3,64.83 CON182.3 | 92.71,75.37 CON181.5 | 97.73,75.37 CON181.3 97.73,75.44 | 92.71,80.45 CON181.4 92.65,80.45 | 97.73,80.45 CON181.2 97.73,80.39 | 74.3,79.18 73.85,79.18 U151.15 73.66,79.06 | 74.3,85.09 73.85,85.09 U151.10 | 84.9,79.18 85.34,79.18 U151.2 85.41,79.18 85.79,79.18 | 84.9,81.47 85.34,81.47 U151.4 84.84,81.47 | 84.9,86.3 85.34,86.3 U151.8 84.84,86.3 | 74.36,85.22 74.36,85.09 U151.10 | 84.84,88.01 84.8,88.04 | 94.3,64.9 CON182.3 | 67.63,75.56 66.04,75.56 | CON151.1 58.42,83.19 66.04,75.56 | 66.04,75.56 C151.- | 69.22,87.63 70.48,87.63 73.03,85.09 73.66,85.09 U151.10 | 69.22,87.63 68.58,87.63 CON151.9 | 69.22,87.63 69.22,93.98 68.58,94.61 CON151.10 | H191.B2,8 12.89,12.89 12.89,23.75 15.18,26.04 16.07,26.04 CON141.4 16.51,26.04 27.94,26.04 29.21,27.3 C141.- 29.21,36.83 | 54.04,30.99 54.42,30.61 54.42,29.59 54.04,29.21 54.04,29.02 U1.J9 | 54.04,30.99 54.99,31.94 U1.F10 55.05,32 55.21,32.16 | 54.04,30.99 U1.G9 | 55.21,32.16 55.44,32.38 55.44,33.02 55.82,33.4 56.01,33.4 56.58,33.97 56.96,33.97 U1.D12 | 56.45,28.45 56.45,28.51 56.17,28.8 | 56.45,28.45 56.45,27.88 56.01,27.43 56.01,27.05 U1.L11 | 56.17,28.8 56.01,28.96 U1.J11 | 56.17,28.8 56.77,29.4 56.96,29.4 57.4,29.84 57.4,29.97 57.98,30.54 57.98,30.99 U1.G13 | 56.45,28.45 58.17,28.45 58.61,28 U1.K14 | 60.29,31.72 60.01,31.43 58.42,31.43 58.04,31.05 U1.G13 | 60.29,31.72 60.48,31.91
  Top 0.127: 60.48,31.91 60.52,31.94 60.96,31.94 U1.F16 | 60.48,31.91 60.45,31.94 60.45,34.16 60.01,34.61 60.01,34.99 U1.C15 59.94,35.05 59.56,35.43 58.99,35.43 58.55,35.88 58.55,36.07 58.17,36.45 56.96,36.45 56.45,36.96 56.01,36.96 U1.A11 | 55.21,32.16 55.94,31.43 57.47,31.43 57.91,30.99 U1.G13 | 60.29,31.72 60.45,31.56 v60.52,31.56 | 60.48,24.1 60.58,24 60.58,22.42 60.96,22.04 U1.T16 | 60.48,24.1 60.04,24.54 | 60.04,24.54 60.01,24.57 60.01,24.96 U1.N15 | 60.48,24.1 60.83,24.45 66.42,24.45 67.94,25.97 68.14,25.97 R104.2 67.88,25.97 67.56,26.29 67.56,30.54 67.69,30.67 92.71,30.67 | 53.05,25.56 53.59,25.02 53.59,23.56 54.04,23.11 U1.R9 54.04,23.05 54.48,23.05 54.99,23.56 56.58,23.56 56.96,23.94 U1.P12 57.02,24 57.53,24.51 60.01,24.51 60.04,24.54 | 53.05,25.56 53.02,25.59 53.02,25.97 U1.M8 | 49.82,24.8 49.97,24.96 U1.N5 50.04,25.02 50.55,25.53 53.02,25.53 53.05,25.56 | 49.82,24.8 49.59,24.57 48.01,24.57 47.43,24 47.05,24 U1.P2 | 49.82,24.8 50.42,24.19 50.42,22.99 50.99,22.42 50.99,22.04 U1.T6 51.05,21.97 51.94,21.08 51.94,19.88 | 51.94,19.88 51.94,16.7 R105.2 | U1.K6 50.99,28.45 50.61,28.83 50.61,29.59 50.99,29.97 U1.H6 50.99,30.04 50.61,30.42 50.61,30.54 | 50.61,30.54 50.61,31.18 50.99,31.56 50.99,31.94 U1.F6 | 53.69,33.75 53.4,34.04 53.4,35.56 53.02,35.94 U1.B8 | 53.69,33.75 53.98,33.47 53.98,33.02 U1.E9 | v53.47,33.53 53.69,33.75 | v50.55,30.54 50.61,30.54 | 49.4,34.61 49.59,34.61 49.97,34.99 U1.C5 | 49.4,34.61 48.01,34.61 47.43,34.04 47.05,34.04 U1.D2 47.05,34.1 46.61,34.54 46.61,36.01 46.04,36.58 46.04,36.96 U1.A1 | 49.31,32.73 49.4,32.83 49.4,34.61 | 49.31,32.73 49.15,32.58 49.02,32.58 48.58,32.13 48.58,32 48.01,31.43 48.01,31.05 U1.G3 48.01,30.99 48.01,30.61 48.58,30.04 48.58,28.38 48.96,28 U1.K4 48.96,27.94 48.58,27.56 46.99,27.56 46.48,27.05 46.04,27.05 U1.L1 45.97,27.05 39.69,27.05 34.1,32.64 31.75,32.64 R021.2 31.75,33.66
  Top 0.127: v49.53,32.51 49.31,32.73 | v52.13,19.88 51.94,19.88 | D031.A 34.04,42.86 35.24,42.86 35.5,42.61 37.53,42.61 38.8,43.88 38.8,44.64 U031.2 | 31.75,33.66 31.75,34.16 34.04,36.45 34.04,42.8 D031.A | v33.08,42.86 33.97,42.86 D031.A | 31.75,33.66 33.02,34.92 33.02,36.83 29.21,36.83
  Top 0.406: 74.3,79.18 75.56,79.63 75.56,84.33 74.3,85.09 | 84.9,79.18 83.69,79.56 83.69,81.23 84.9,81.47 | 84.9,86.3 83.69,85.94 83.69,81.97 84.84,81.47 | 74.36,85.22 75.56,85.98 75.56,89.09 | 84.84,86.3 84.84,88.01 | 67.63,75.56 71.12,79.06 73.66,79.06
  Top 0.61: CON182.3 94.3,57.15 | CON185.3 CON186.2 | CON186.5 93.98,12.7 | 93.98,12.7 CON186.3 CON186.2 | CON186.2 CON186.4 CON185.5 CON185.3 | 92.71,30.92 92.71,30.67 CON185.4 CON185.2 | CON184.5 CON184.3 | 94.3,45.72 CON183.2 CON183.3 | 94.3,45.72 CON183.4 | CON183.3 CON184.2 | CON184.2 CON184.4 CON183.5 CON183.3 | CON184.2 CON184.3 | CON185.2 CON185.3 | 93.98,12.7 H192.B2,8 | 94.3,45.72 94.3,57.09 | 97.73,75.37 94.3,75.37 | 94.3,75.37 92.71,75.37 | 97.73,80.45 92.71,80.45 | 97.73,80.39 97.73,75.44 | 75.56,89.09 83.76,89.09 84.8,88.04 90.74,93.98 H193.B2,8 | 92.65,80.45 90.38,80.43 85.79,79.18 | 94.3,64.9 94.3,75.37 | CON184.3 CON185.2
  Bottom 0.127: C152.2 76.2,78.42 76.2,76.2 87.63,64.77 93.98,64.77 CON182.3 | C054.2 59.18,25.02 59.18,26.04 60.13,26.99 C1026.2 60.2,27.05 60.96,27.81 | 60.96,27.81 60.96,28.83 C067.2 | 60.96,27.81 62.67,26.1 64.96,26.1 C1021.2 64.96,26.16 65.98,27.18 65.98,30.16 64.52,31.62 C091.2 64.45,31.69 60.52,31.69 | C1005.2 58.17,29.02 58.17,30.04 59.12,30.99 C1024.2 59.18,31.05 60.1,31.97 | 60.1,31.97 60.13,32 60.13,32.96 C066.2 60.2,33.02 60.2,38.73 60.26,38.8 60.26,39.31 60.01,39.56 58.74,39.56 57.82,38.64 | 60.52,31.69 60.39,31.69 60.1,31.97 | C084.2 46.86,35.05 46.86,36.01 47.82,36.96 C082.2 47.88,37.02 48.07,37.02 52.77,41.72 54.93,41.72 55.94,40.7 55.94,40.51 C1011.2 56.01,40.45 57.82,38.64 | C085.2 49.85,34.99 49.21,34.99 48.58,34.35 47.62,34.35 46.93,35.05 C084.2 | 57.82,38.64 57.85,38.61 57.85,37.02 C062.2 | 60.52,31.69 v60.52,31.56 | C064.2 56.9,34.99 57.15,34.73 C1012.2 57.15,32.13 56.2,31.18 56.2,31.05 C092.2 56.13,30.99 55.5,30.35 54.99,30.35 54.7,30.07 | 54.7,30.07 53.91,29.27 53.91,29.02 C063.2 | 52.8,32.54 52.83,32.58 52.83,33.53 | 52.8,32.54 51.88,31.62 51.88,31.05 C1022.2 | 52.83,33.53 52.83,34.99 C065.2 | 52.83,33.53 v53.47,33.53 | C1022.2 51.82,30.99 51.37,30.54 v50.55,30.54 49.78,30.54 49.59,30.35 48.64,30.35 47.94,31.05 C1004.2 | 54.7,30.07 53.72,31.05 53.72,31.62 52.8,32.54 | 44.83,32.96 43.05,32.96 42.04,31.94 C1001.2 | 44.83,32.96 46.8,32.96 C086.2 | C1004.2 47.82,30.99 46.74,29.91 46.04,29.91 C087.2 46.04,29.97 44.83,31.18 44.83,32.96 | 49.44,32.61 47.88,31.05 C1004.2 | 49.44,32.61 49.78,32.96 50.8,32.96 C1002.2 | 49.44,32.61 v49.53,32.51 | C057.2 55.88,23.05 55.88,24.7 56.13,24.96 C1025.2 56.13,25.02 55.88,25.27 55.88,26.16
  Bottom 0.127: 55.88,26.16 55.88,26.99 C052.2 | 52.13,22.04 52.83,22.04 C053.2 | 52.13,22.04 51.18,22.99 C072.2 51.18,23.05 51.82,23.69 51.82,24.96 C055.2 | 52.83,26.16 52.83,26.99 C1023.2 52.9,27.05 52.96,27.11 52.96,29.78 51.82,30.92 C1022.2 | 52.83,26.16 51.88,25.21 51.88,25.02 C055.2 | 52.13,22.04 v52.13,19.88 52.13,18.54 C051.2 | 52.83,26.16 55.88,26.16 | 42.96,23.59 42.99,23.62 42.99,25.46 42.04,26.42 C041.2 | 42.96,23.59 42.35,22.99 42.35,22.04 C071.2 | 48.2,23.56 48.2,24.32 48.83,24.96 C056.2 48.83,25.02 48.83,27.05 | 48.2,23.56 48.2,22.04 C073.2 | 48.83,27.05 49.85,27.05 C1003.2 | 48.83,27.05 48.2,27.05 C1006.2 | C083.2 50.1,28.96 50.1,27.37 49.85,27.11 C1003.2 | 48.2,23.56 42.99,23.56 42.96,23.59 | C055.2 51.88,25.27 51.63,25.27 49.91,26.99 C1003.2 | v33.08,42.86 C031.2 | C041.2 41.97,26.48 41.97,27.11 40.13,28.96 40.13,32.38 42.74,34.99 46.8,34.99 C084.2 | C142.2 24.13,25.4 41.91,25.4 41.91,26.04 C041.2
GPS_2ND_RX  (via drill 0.3)
  Top 0.127: v86.81,84.45 85.92,84.45 85.41,83.95 U151.6
  Bottom 0.127: R152.1 87.44,85.09 v86.81,84.45
GPS_ANT
  Top 0.127: 95.19,77.92 CON181.1 | 86.89,77.92 U151.1
  Top 1.27: 86.89,77.92 95.19,77.92
GPS_ANT_PWR  (via drill 0.3)
  Top 0.305: 85.92,80.39 85.41,80.39 U151.3 | v61.59,95.89 60.96,95.25 CON151.4 | 90.17,84.45 v93.34,87.63 | 90.17,84.45 | 90.17,84.45 RP151.1
  Top 0.406: 90.17,84.64 90.17,84.45 90.17,81.45 85.92,80.39
  Bottom 0.305: v61.59,95.89 63.5,93.98 87,93.98 v93.34,87.63
GPS_NMEA_RX
  Top 0.127: CON151.5 63.5,87.63 64.77,87.63 69.85,82.55 73.66,82.55 U151.12
GPS_NMEA_TX
  Top 0.127: CON151.6 63.5,94.61 65.41,92.71 65.41,92.08 67.31,90.17 67.31,87.63 71.12,83.82 73.66,83.82 U151.11
GPS_NRESET  (via drill 0.3)
  Top 0.127: v87,86.36 85.72,85.09 U151.7
  Bottom 0.127: v87,86.36 87.63,86.36 88.9,87.63 R151.1
GPS_PPS
  Top 0.127: CON151.7 66.04,88.27 64.14,90.17 64.14,90.81 62.23,92.71 62.23,95.25 62.87,95.89 69.22,95.89 73.66,91.44 73.66,86.36 U151.9
PWR_1V0
  Top 0.254: R101.2 38.86,29.02 38.86,30.8 39.5,31.43 39.5,33.85 49.91,44.26 53.91,44.26 54.48,43.69 R102.2
PWR_1V8
  Top 0.254: R091.2 50.55,43.69 52.45,43.69 R041.2 52.58,43.56 53.15,42.99 55.05,42.99 55.69,43.62 56.45,43.62 R103.2
PWR_3V3  (via drill 0.3)
  Top 0.305: R031.1 31.69,35.75 31.69,34.61 30.67,33.59 30.67,31.94 30.86,31.75 32.64,31.75 38.8,25.59 38.8,24.64 R042.2 38.86,24.45 38.86,22.04 R071.2 38.92,21.91 46.16,14.67 52.51,14.67 53.15,15.3 54.99,15.3 R051.2 55.12,15.43 58.8,15.43 68.83,25.46 68.83,26.54 68.2,27.18 68.2,29.97 R061.2 67.94,29.84 v69.22,29.84 | RP151.2 90.17,87.25 v91,86.42 | R081.2 38.73,32.38 38.73,39.37 39.37,39.37 73.66,73.66 v73.66,76.83 73.66,78.11 U151.16
  Bottom 0.305: 91.12,86.42 R151.2 91,87.69 89.98,88.71 77.41,88.71 68.77,80.07 68.77,76.39 | 91.12,86.42 R152.2 | v91,86.42 91.12,86.42 | 68.77,76.39 69.72,76.39 C152.1 | 68.77,76.39 66.99,76.39 D151.1 | v73.66,76.83 69.85,76.83 C152.1 | v69.22,29.84 69.85,30.48 C152.1
PWR_BACKUP_GPS  (via drill 0.3)
  Top 0.254: v64.77,78.74 65.41,78.74 66.04,79.38 C151.+ | U151.14 73.66,80.33 66.67,80.33 66.04,79.69 C151.+ | CON151.2 58.42,94.61 59.05,94.61 59.69,93.98 59.69,86.36 66.04,80.01 C151.+
  Bottom 0.254: v64.77,78.74 66.04,78.74 D151.3
PWR_VCTCXO_3V0  (via drill 0.3)
  Top 0.254: D031.C v33.02,39.88 33.02,39.05 R031.2 | v34.54,40.89 36.51,40.89 U031.4
  Bottom 0.254: 33.02,40.89 31.81,40.89 C031.1 | 33.02,40.89 v34.54,40.89 | 33.02,40.89 v33.02,39.88
USB_5V  (via drill 0.3)
  Top 0.381: v22.86,24.45 22.86,22.86 RP141.2 28.89,22.86 29.21,23.18 C141.+
  Bottom 0.381: v22.86,24.45 22.86,23.5 24.13,23.5 C142.1
USB_D_MIN1
  Top 0.127: D142.C 17.46,35.56 17.43,35.59 | R142.1 17.43,35.59 | R142.1 R144.1 | R142.1 | 17.43,35.59 13.59,31.75 13.59,28.13 14.41,27.3 15.3,27.3 CON141.2
USB_D_PLS1
  Top 0.127: 24.13,29.59 25.08,30.54 25.08,35.56 D141.C | 24.13,29.59 20.32,29.59 R143.2 19.37,28.57 15.37,28.57 CON141.3 | 24.13,29.59 R141.1
USB_PWR1
  Top 0.127: RP141.1 18.86,22.89 16.84,24.85 CON141.1

## Text on the board
Top: Top
Bottom: Bot
tPlace: I2C | SERVICE-GPS | GPS-Ant. / MCX | Ethernet | 10 MHz / Ref-Out | USB-B | JTAG
bNames: DF4IAH / 10 MHz Ref.-Osc. / V 3.0